# Altium PCB PCB1.PcbDoc
Units mil, origin at the board's own origin, x right, y up, seen from the top; angles counter-clockwise.
Board outline 20165 x 9400 mil, 2 copper layers (Top Layer, Bottom Layer); 43 components, 126 nets, 206 pads, 0 vias.
Unrouted connection lines stored in the file: 1.
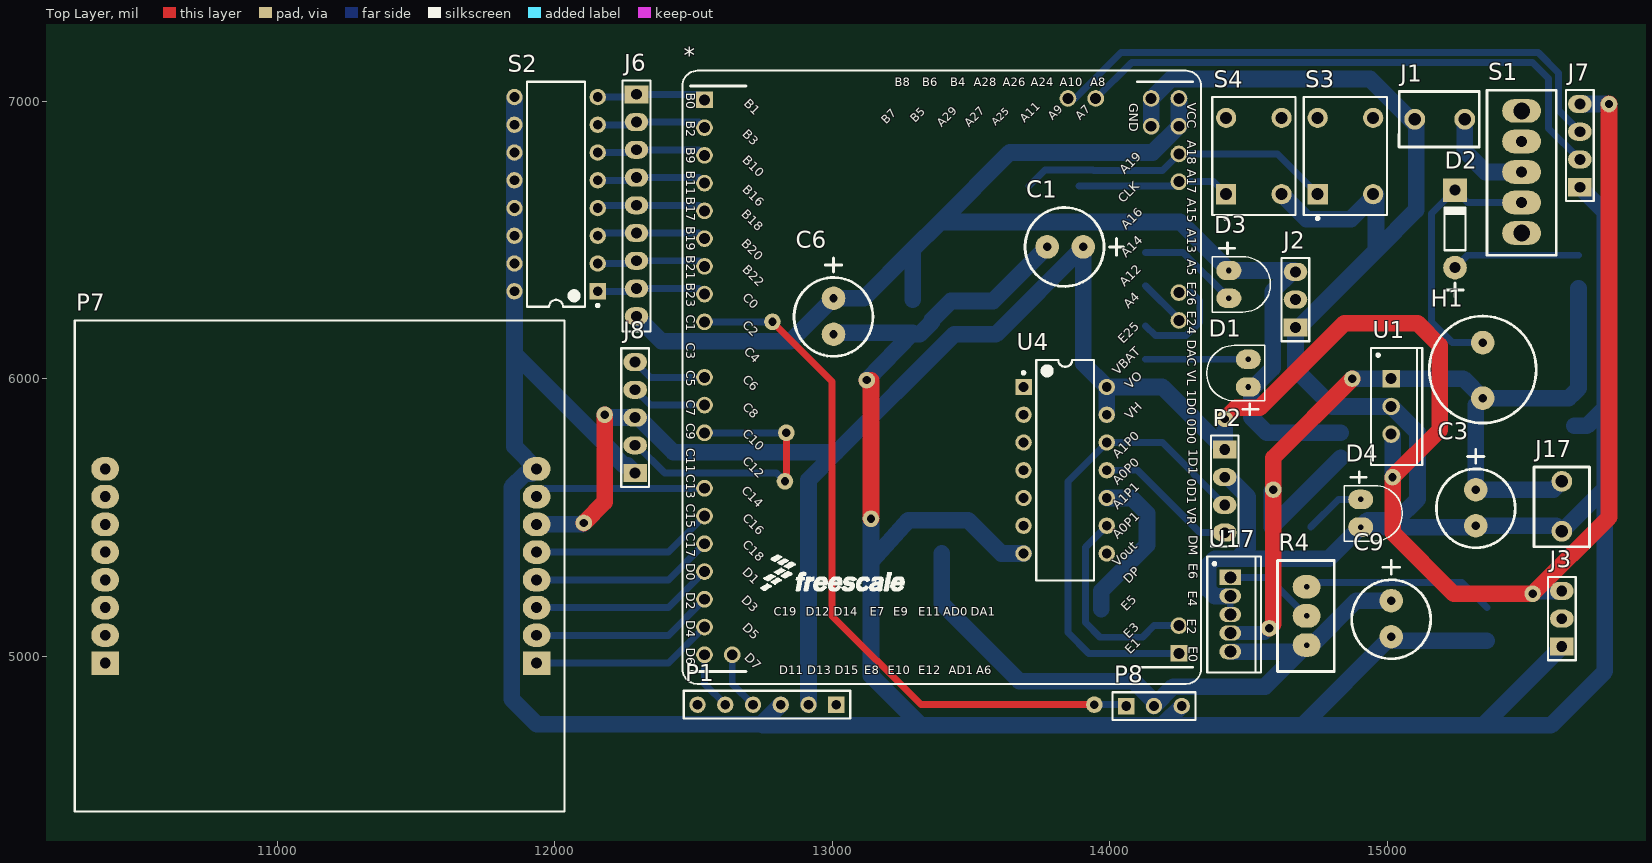
[diagram p0: Top Layer view]
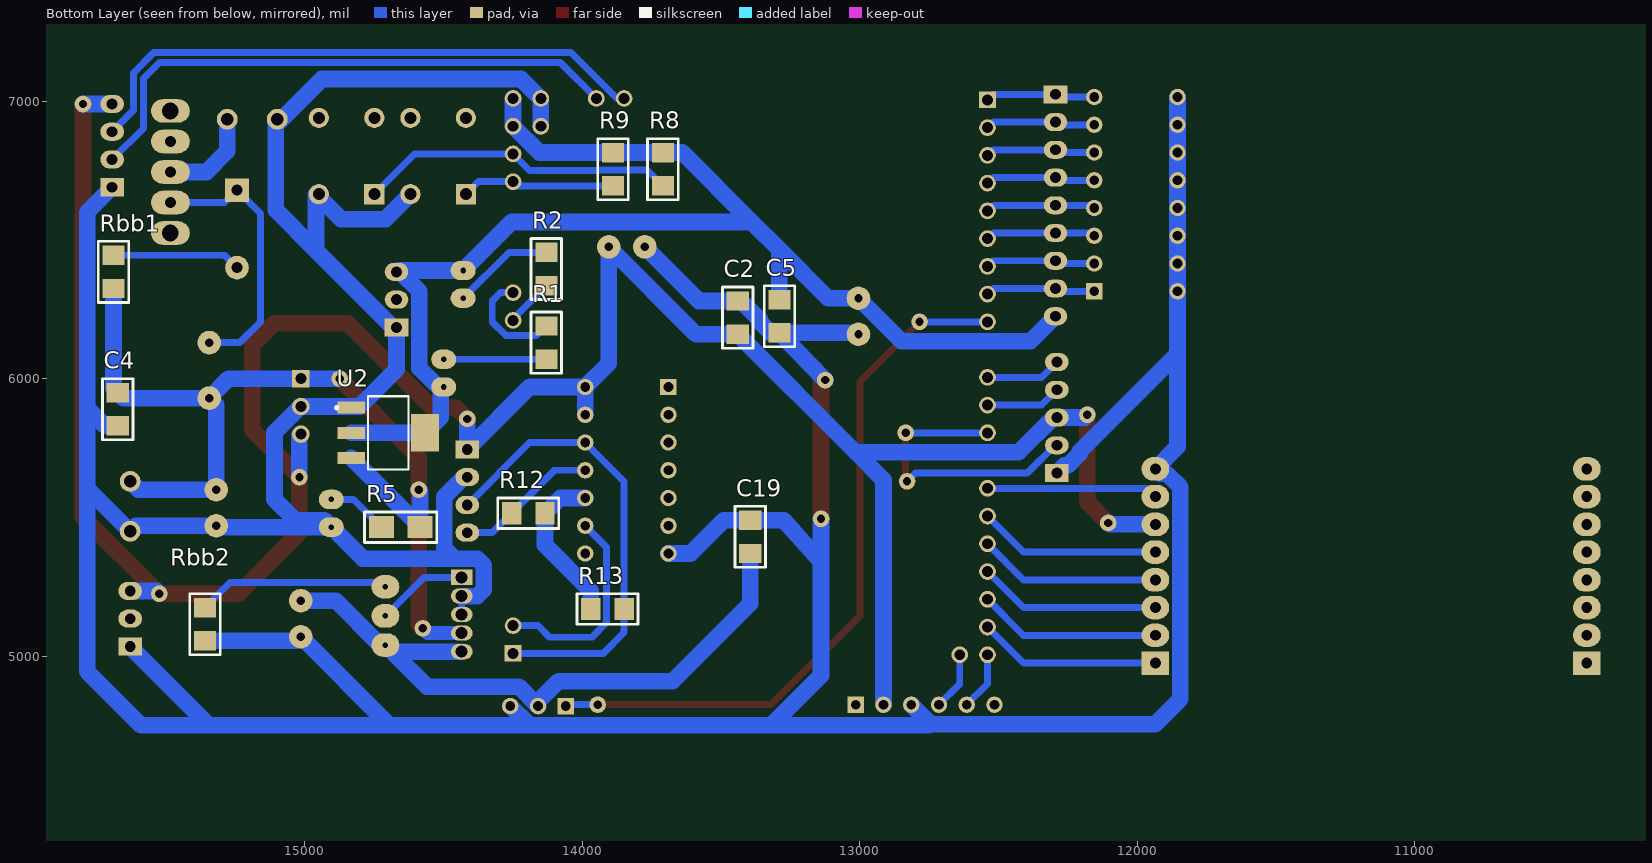
[diagram p1: Bottom Layer view, seen from below]

## Layer stack, top to bottom
Top Layer: signal copper 1.4
Dielectric: dielectric 12.6, FR-4, Dk 4.8
Bottom Layer: signal copper 1.4

## Board outline
9450,10320 29615,10320 29615,920 9450,920 9450,10320

## Design rules (kind name [scope] priority, off if disabled: settings)
Clearance [All] p1: gap=10
PolygonConnect [All] p1: connectstyle=Relief reliefconductorwidth=10 reliefentries=4 polygonreliefangle="90 Angle" airgapwidth=10
RoutingVias [All] p1: holewidth=28 width=50 viastyle="Through Hole" minholewidth=28 minwidth=50 maxholewidth=28 maxwidth=50
SolderMaskExpansion [All] p1: expansion=4
Width [All] p1: maxlimit=100 minlimit=10 preferedwidth=30
28 further rules are at their usual default settings.

## Components (designator, comment, footprint, x,y, rotation, side; value= is the part's Value field where it differs from the comment)
* "Component_2" K60 13950,6910 r0 top
C1 "CAP+DIP" CAP+DIP 13840,6475 r180 top
C2 "CAP" CAP 13440,6225 r270 bottom
C3 "CAP+DIP" CAP+DIP 15320,5535 r270 top
C4 "CAP" CAP 15675,5885 r90 bottom
C5 "CAP" CAP 13290,6220 r90 bottom
C6 "CAP+DIP" CAP+DIP 13005,6225 r270 top
C9 "CAP+DIP" CAP+DIP 15015,5135 r270 top
C19 "CAP" CAP 13395,5435 r270 bottom
D1 "LED" LED 14490,6020 r90 top
D2 "Diode" DIODE-DIP 15245,6535 r90 top
D3 "LED" LED 14440,6340 r270 top
D4 "LED" LED 14915,5515 r270 top
H1 "Inductor_G" INDUCTOR-G 15345,6130 r270 top
J1 "JJ" "PCBComponent_1 - duplicate" 15280,6935 r180 top
J2 "Header1x3" HEADER1X3 14670,6285 r90 top
J3 "Header1x3" HEADER1X3 15630,5135 r90 top
J6 "Header1x9" HEADER1X9 12295,6625 r270 top
J7 "Header1x4" HEADER1X4 15695,6840 r90 top
J8 "Header1x5" HEADER1X5 12300,5855 r90 top
J17 "JJ" "PCBComponent_1 - duplicate" 15630,5630 r270 top
P1 "Bluetooth" HDR1X6 13015,4825 r180 top
P2 "编码器1接口" header1x4 14415,5595 r270 top
P7 "LCD-Nokia" LCD-NOKIA 11100,5335 r90 top
P8 "Header 3" HDR1X3 14060,4820 r0 top
R1 "1K" "res a" 14130,6070 r0 bottom
R2 "1K" "res a" 14130,6455 r180 bottom
R4 "RES-Change" RES-Change 14705,5150 r90 top
R5 "RES" res 14655,5465 r0 bottom
R8 "Res2" "res a" 13710,6815 r180 bottom
R9 "Res2" "res a" 13890,6815 r180 bottom
R12 "RES" "RES a" 14255,5515 r90 bottom
R13 "RES" "RES a" 13850,5170 r270 bottom
Rbb1 "Res2" "res a" 15690,6325 r0 bottom
Rbb2 "Res2" "res a" 15360,5055 r0 bottom
S1 "SW-2" SW-2 15490,6745 r270 top
S2 "SW-DIP8" DIP-16 12005,6665 r180 top
S3 "SW-Button-B" DPST-4 14750,6665 r90 top
S4 "SW-Button-B" DPST-4 14420,6665 r90 top
U1 "LM2940T-5.0" T03B 15015,5900 r270 top
U2 "REG1117" REG1117 14720,5800 r180 bottom
U4 "74LS74" DIP-14 13840,5670 r0 top
U17 "LM2941CT" T05A 14435,5150 r270 top

## Footprints (in the part's own frame and the unit in brackets; to place one, negate y for a bottom-side part, rotate by r counter-clockwise, add the part's x,y. Pads: shape width x height; smd on the part's side, far side on the other; paste and mask are expansions set on the pad)
CAP [mil]
  rect 70x80 smd: 1(-55,0) 2(65,0)
  silkscreen extent -105,-55 115,55
CAP+DIP [mil]
  round 85 hole 30: 1(-65,0) 2(65,0)
  silkscreen extent -210,-142 144,142
DIODE-DIP [mil]
  round 85 hole 39: 1(-134.76,0)
  rect 85x85 hole 39: 2(144.76,0)
  silkscreen extent -240,-37 86,37
DIP-14 [mm] "DIP; 14 Leads; Row Spacing 7.62 mm; Pitch 2.54 mm"
  rect 1.5x1.5 hole 0.9: 1(-3.81,7.62)
  round 1.5 hole 0.9: 2(-3.81,5.08) 3(-3.81,2.54) 4(-3.81,0) 5(-3.81,-2.54) 6(-3.81,-5.08) 7(-3.81,-7.62) 8(3.81,-7.62) 9(3.81,-5.08) 10(3.81,-2.54) 11(3.81,0) 12(3.81,2.54) 13(3.81,5.08) 14(3.81,7.62)
  silkscreen extent -3.93,-10.1 2.65,10.1, body extent -3.6,-10.1 3.6,10.1, height 5.08
DIP-16 [mm] "DIP; 16 Leads; Row Spacing 7.62 mm; Pitch 2.54 mm"
  rect 1.5x1.5 hole 0.9: 1(-3.81,8.89)
  round 1.5 hole 0.9: 2(-3.81,6.35) 3(-3.81,3.81) 4(-3.81,1.27) 5(-3.81,-1.27) 6(-3.81,-3.81) 7(-3.81,-6.35) 8(-3.81,-8.89) 9(3.81,-8.89) 10(3.81,-6.35) 11(3.81,-3.81) 12(3.81,-1.27) 13(3.81,1.27) 14(3.81,3.81) 15(3.81,6.35) 16(3.81,8.89)
  silkscreen extent -3.94,-10.3 2.65,10.31, body extent -3.6,-10.28 3.6,10.28, height 5.08
DPST-4 [mm] "Switch; 4 Leads"
  rect 1.85x1.85 hole 1.1: 1(0,0)
  round 1.85 hole 1.1: 2(0,-5.08) 3(6.985,-5.08) 4(6.985,0)
  silkscreen extent -2.34,-6.35 8.89,1.27
HDR1X3 [mm] "Connector; Header; 3 Position"
  rect 1.5x1.5 hole 0.9: 1(0,0)
  round 1.5 hole 0.9: 2(2.54,0) 3(5.08,0)
  silkscreen extent -1.27,-1.27 6.35,1.27
HDR1X6 [mm] "Connector; Header; 6 Position"
  rect 1.5x1.5 hole 0.9: 1(0,0)
  round 1.5 hole 0.9: 2(2.54,0) 3(5.08,0) 4(7.62,0) 5(10.16,0) 6(12.7,0)
  silkscreen extent -1.27,-1.27 13.97,1.27
HEADER1X3 [mil]
  rect 65x85 hole 39: 1(-100,0)
  oval 65x85 hole 39: 2(0,0) 3(100,0)
  silkscreen extent -150,-50 150,50
HEADER1X4 [mil]
  rect 65x85 hole 39: 1(-150,0)
  oval 65x85 hole 39: 2(-50,0) 3(50,0) 4(150,0)
  silkscreen extent -200,-50 200,50
header1x4 [mil]
  rect 65x85 hole 39: 1(-150,0)
  oval 65x85 hole 39: 2(-50,0) 3(50,0) 4(150,0)
  silkscreen extent -200,-50 200,50
HEADER1X5 [mil]
  rect 65x85 hole 39: 1(-195,10)
  oval 65x85 hole 39: 2(-95,10) 3(5,10) 4(105,10) 5(205,10)
  silkscreen extent -245,-40 255,60
HEADER1X9 [mil]
  rect 65x85 hole 39: 1(-400,0)
  oval 65x85 hole 39: 2(-300,0) 3(-200,0) 4(-100,0) 5(0,0) 6(100,0) 7(200,0) 8(300,0) 9(400,0)
  silkscreen extent -450,-50 455,50
INDUCTOR-G [mil]
  round 85 hole 30: 1(0,0) 2(200,0)
  silkscreen extent -95,-193 290,193
K60 [mil]
  rect 60x60 hole 39.37: 1(-1410,95) 59(300,-1900)
  round 60 hole 39.37: 3(-1410,-5) 5(-1410,-105) 7(-1410,-205) 9(-1410,-305) 11(-1410,-405) 13(-1410,-505) 15(-1410,-605) 17(-1410,-705) 21(-1410,-905) 23(-1410,-1005) 25(-1410,-1105) 29(-1410,-1305) 31(-1410,-1405) 33(-1410,-1505) 35(-1410,-1605) 37(-1410,-1705) 39(-1410,-1805) 41(-1410,-1905) 42(-1310,-1905) 61(300,-1800) 83(300,-700) 85(300,-600) 93(300,-200) 95(300,-100) 97(300,0) 98(200,0) 99(300,100) 100(200,100) 102(0,100) 104(-100,100)
  silkscreen extent -1490,-2010 380,200
LCD-NOKIA [mil]
  rect 85x100 hole 39: 1(-360,-835) ""(-360,720)
  oval 85x100 hole 39: 2(-260,-835) 3(-160,-835) 4(-60,-835) 5(40,-835) 6(140,-835) 7(240,-835) 8(340,-835) ""(-260,720) ""(-160,720) ""(-60,720) ""(40,720) ""(140,720) ""(240,720) ""(340,720)
  silkscreen extent -895,-935 875,830
LED [mil]
  oval 70x90 hole 20: 1(-50,-10) 2(50,-10)
  silkscreen extent -150,-70 100,140
"PCBComponent_1 - duplicate" [mm]
  round 1.905 hole 1.16: 1(0,0) 2(4.572,0)
  silkscreen extent -1.32,-2.54 6.02,2.54
REG1117 [mm]
  rect 2.54x1.1 smd: 1(-2.867,2.427) 2(-2.867,0.127) 3(-2.867,-2.173)
  rect 2.54x3.45 smd: 4(3.883,0.127)
  silkscreen extent -4.32,-3.22 2.36,3.48
res [mil]
  rect 90x80 smd: 1(-70,0) 2(70,0)
  silkscreen extent -130,-55 130,55
"res a" [mil]
  rect 80x70 smd: 1(0,0) 2(0,-120)
  silkscreen extent -55,-170 55,50
"RES a" [mil]
  rect 80x70 smd: 1(0,0) 2(0,-120)
  silkscreen extent -55,-170 55,50
RES-Change [mil]
  oval 85x100 hole 20: 1(-110,-5) 2(100,-5) 3(-5,-5)
  silkscreen extent -205,-105 195,100
SW-2 [mil]
  oval 85x140 hole 39: 1(-110,-5) 2(0,-5) 3(110,-5)
  oval 85x140 hole 60: ""(-220,-5) ""(220,-5)
  silkscreen extent -295,-130 300,120
T03B [mm] "TO, Thru-Hole, Vertical, Heatsink Mounted; 3 In-Line Leads; Pitch 2.54 mm"
  rect 1.6x1.6 hole 1: 1(-2.54,0)
  round 1.6 hole 1: 2(0,0) 3(2.54,0)
  silkscreen extent -5.35,-1.85 5.35,2.85, body extent -5.4,-1.9 5.4,2.9, height 19.4
T05A [mm] "TO, Thru-Hole, Vertical, Heatsink Mounted; 5 In-Line Leads; Pitch 1.70 mm"
  rect 1.4x2 hole 1.1: 1(-3.4,0)
  oval 1.4x2 hole 1.1: 2(-1.7,0) 3(0,0) 4(1.7,0) 5(3.4,0)
  silkscreen extent -5.3,-2.1 5.3,2.8, body extent -5.35,-2.15 5.35,2.85, height 19.6

## Part data
P2: library part "Header 4", "Header, 4-Pin"
P8: "Header, 3-Pin"
R1 R2: library part Res1
R8 R9 Rbb1 Rbb2: "Resistor"
U1: "1A Low Dropout Regulator, 3-pin TO-220"
U17: "1A Low Dropout Adjustable Regulator, 5-pin TO-220"

## Free pads (board coordinates)
  round 60 hole 30: 0(14415,5855) 0(14575,5100) 1(13125,5995) 1(13945,4825) 2(12785,6205) 3(13140,5495) 4(12180,5870) 5(12105,5480) 6(12830,5630) 7(12835,5805) 8(14590,5600) 9(14875,6000) 13(15800,6990) 14(15525,5225) 15(15020,5645)

## Nets (pads, with @x,y where several pads share a name; then routed paths per layer and width w, separated by ;. In a path a pad name is that pad's centre, name@x,y a point inside that pad or via, vN(x,y) a via of type N, cw(c..) or ccw(c..) an arc to the next point about the centre after c; other vN are vias at no path point)
0D0: 
0D1: 
1D0: 
1D1: 
3.3V: *.97 *.99 C5.2 C6.1 D1.1 D3.1 J2.3 J6.9 R8.1 R9.1 U2.2 U2.4 | length 4890.9
  Bottom Layer w60: J6.9 12385,6135 12850,6135 C6.1 13115,6290 13290,6465 ; C5.2 13290,6465 ; *.99 *.97 14155,6815 R9.1 R8.1 13640,6815 13390,6565 ; U2.2 U2.4 14510,5862.13 14510,5960 14587.5,6037.5 14587.5,6315.03 14657.47,6385 J2.3 14665,6390 D3.1 14255,6565 13390,6565 ; 13290,6465 13390,6565
5V: C1.1 C2.2 J3.3 J7.4 J8.3 P1.2 P2.1 P7.6 pad.0@14415,5855 pad.4 pad.5 pad.13 pad.14 pad.15 R12.2 R13.2 U1.3 U4.10 U4.13 U4.14 | length 10024.2
  Top Layer w60: pad.5 12180,5555 pad.4 ; pad.0@14415,5855 14455,5895 14541.07,5895 14846.07,6200 15110,6200 15190,6120 15190,5815 pad.15 15020,5445 15240,5225 pad.14 15800,5500 pad.13
  Bottom Layer w60: P7.6 12100,5475 pad.5 ; pad.4 12190,5860 J8.3 12302.53,5860 12427.53,5735 13015,5735 ; P1.2 12915,5635 13015,5735 ; R13.2 13970,5235 14135,5400 R12.2 14080,5570 U4.10 ; U4.13 U4.14 ; pad.0@14415,5855 P2.1 14190,5970 U4.14 ; U1.3 15020,5795 pad.15 ; pad.14 15535,5235 J3.3 ; J7.4 pad.13 ; 13015,5735 C2.2 13590,6160 C1.1 13905,6055 U4.14
6V: C9.1 C19.2 P8.2 R4.1 U17.5 | length 2370
  Bottom Layer w60: C19.2 13395,5189.53 13674.53,4910 14085.62,4910 14159.8,4835.82 14159.8,4820.47 14229.33,4890 14560,4890 R4.1@14685.51,5015.51 ; U17.5@14435,5015.51 R4.1@14685.51,5015.51 ; C9.1 14889.17,5200 14729.17,5040 R4.1 R4.1@14685.51,5015.51
7.2V: C3.1 C4.2 H1.2 J17.1 pad.0@14575,5100 pad.8 pad.9 R5.1 Rbb1.1 U1.1 U2.3 U17.4 | length 3540.2
  Top Layer w60: pad.0@14575,5100 14590,5115 pad.8 14590,5715 pad.9
  Bottom Layer w50: U17.4 14558.07,5083.07 pad.0@14575,5100
  Bottom Layer w60: R5.1 R5.1@14585,5466.57 ; pad.8 14585,5595 R5.1@14585,5466.57 ; U2.3 R5.1@14585,5466.57 ; pad.9 U1.1 15275,6000 H1.2 ; J17.1 15600,5600 C3.1 15320,5905 H1.2 ; Rbb1.1 15690,5965 C4.2 15655,5930 H1.2
A0P0: 
A0P1: 
A1P0: 
A1P1: 
AD0: 
AD1: 
CLK: 
DA1: 
DAC: 
DGND: *.98 *.100 C1.2 C2.1 C3.2 C4.1 C5.1 C6.2 C9.2 C19.1 D4.2 J1.2 J2.1 J3.1 J7.1 J8.1 J17.2 P1.3 P2.2 P7.8 P8.3 pad.1@13125,5995 pad.3 Rbb2.1 S2.9 S2.10 S2.11 S2.12 S2.13 S2.14 S2.15 S2.16 S3.2 S4.2 U1.2 U2.1 U4.7 U17.2 U17.3 | length 19480.1
  Top Layer w60: pad.1@13125,5995 13140,5995 pad.3
  Bottom Layer w25: U17.3 U17.2@14435,5216.3
  Bottom Layer w60: S2.9 S2.10 S2.11 S2.12 S2.13 S2.14 S2.15 S2.16 11855,6090 ; J8.1 12262.5,5687.5 12249.97,5687.5 12207.5,5729.97 12207.5,5737.5 11855,6090 ; P1.3 12745,4755 ; C6.2 13010,6165 C5.1 pad.1@13125,5995 ; pad.3 13140,5340.5 ; C5.1@13290,6160 13315,6160 13360,6205 13360,6211.57 13428.43,6280 C2.1 13580,6280 C1.2 ; U4.7 13610,5370 13490,5490 C19.1 13275,5490 13144.5,5345 13140,5340.5 ; *.98 *.100 14151.01,7010 14221.01,7080 14938.94,7080 15105,6913.94 15105,6607.47 14960,6462.47 ; P8.3 14195,4755 14193.33,4755 14188.8,4750.47 ; P2.2 14427.53,5645 14497.5,5575.03 14497.5,5388.73 14460.18,5351.42 ; U17.2@14435,5216.3 14379.06,5216.3 14355.63,5239.73 14355.63,5327.99 14379.06,5351.42 14460.18,5351.42 ; S4.2 14710,6575 14870,6575 14960,6665 14960,6462.47 ; Rbb2.1 15030,5055 C9.2 14695.47,4750.47 ; J3.1 15345.47,4750.47 ; C4.1 15720,5830 15785,5895 ; J7.1 15785,6600 15785,5895 ; 15785,5538.43 15785,5605 ; 11855,6090 11855,5755 P7.8 11917.5,5657.5 11893.33,5657.5 11845,5609.17 11845,4845 11935,4755 12745,4755 ; 12745,4755 12749.53,4750.47 13320,4750.47 ; 13140,5340.5 13140,4930.47 13320,4750.47 ; 13320,4750.47 14188.8,4750.47 ; 14188.8,4750.47 14695.47,4750.47 ; 14460.18,5351.42 14791.42,5351.42 D4.2 ; 14695.47,4750.47 15345.47,4750.47 ; D4.2 14930,5490 15035,5490 15110,5565 15110,5806.11 15016.11,5900 U1.2 14803.42,5900 14670,6033.43 J2.1 14682.53,6185 14960,6462.47 ; D4.2 15315,5465 C3.2 15610,5470 J17.2 15785,5605 ; 15345.47,4750.47 15590.47,4750.47 15785,4945 15785,5605 ; 15785,5605 15785,5895
DM: 
DP: 
NetD1_2: D1.2 R1.1 | length 370
  Bottom Layer w25: R1.1 D1.2
NetD2_1: D2.1 Rbb1.2 | length 463.5
  Bottom Layer w25: D2.1 15289.76,6445 Rbb1.2
NetD2_2: D2.2 H1.1 S1.3 | length 984.6
  Bottom Layer w25: H1.1 15235,6130 15160,6205 15160,6594.76 D2.2 15289.76,6635 S1.3
NetD3_2: D3.2 R2.1 | length 368.3
  Bottom Layer w25: R2.1 14265,6455 D3.2
NetD4_1: D4.1 R5.2 | length 221.4
  Bottom Layer w25: R5.2 14825,5565 D4.1
NetJ1_1: J1.1 S1.2 | length 351.1
  Bottom Layer w60: J1.1 15280,6820 15355,6745 S1.2
NetP2_4: P2.4 R12.1 U4.11 | length 518.2
  Bottom Layer w25: U4.11 14100,5670 R12.1 14325,5445 P2.4
NetR4_2: R4.2 Rbb2.2 | length 693.5
  Bottom Layer w25: R4.2 14725,5265 15270,5265 Rbb2.2
NetR4_3: R4.3 U17.1 | length 332.5
  Bottom Layer w25: U17.1 14571.14,5283.86 R4.3
PTA4: 
PTA5: 
PTA6: 
PTA7: 
PTA8: *.102 J7.2 | length 2049.3
  Bottom Layer w25: *.102 14080,7140 15525,7140 15582.5,7082.5 15582.5,6902.5 J7.2
PTA9: 
PTA10: *.104 J7.3 | length 2110.5
  Bottom Layer w25: *.104 13875.75,7010 14040.75,7175 15545,7175 15617.5,7102.5 15617.5,6967.5 J7.3
PTA11: 
PTA12: 
PTA13: 
PTA14: 
PTA15: 
PTA16: 
PTA17: *.93 R9.2 S4.1 | length 554.9
  Bottom Layer w25: R9.2 14235,6695 *.93 14375,6710 S4.1
PTA18: *.95 R8.2 S3.1 | length 1149.8
  Bottom Layer w25: R8.2 13767.5,6752.5 13939.32,6752.5 13941.82,6750 14190,6750 *.95 14605,6810 S3.1
PTA19: 
PTA24: 
PTA25: 
PTA26: 
PTA27: 
PTA28: 
PTA29: 
PTB0: *.1 J6.1 S2.8 | length 397.4
  Bottom Layer w25: S2.8 12285,7015 J6.1 12520,7025 *.1
PTB1: 
PTB2: *.3 J6.2 S2.7 | length 397.4
  Bottom Layer w25: S2.7 12285,6915 J6.2 12520,6925 *.3
PTB3: 
PTB4: 
PTB5: 
PTB6: 
PTB7: 
PTB8: 
PTB9: *.5 J6.3 S2.6 | length 397.4
  Bottom Layer w25: S2.6 12285,6815 J6.3 12520,6825 *.5
PTB10: 
PTB11: *.7 J6.4 S2.5 | length 397.4
  Bottom Layer w25: S2.5 12285,6715 J6.4 12520,6725 *.7
PTB12: 
PTB17: *.9 J6.5 S2.4 | length 397.4
  Bottom Layer w25: S2.4 12165,6625 J6.5 12520,6625 *.9
PTB18: 
PTB19: *.11 J6.6 S2.3 | length 397.4
  Bottom Layer w25: S2.3 12165,6525 J6.6 12520,6525 *.11
PTB20: 
PTB21: *.13 J6.7 S2.2 | length 397.4
  Bottom Layer w25: S2.2 12285,6415 J6.7 12520,6425 *.13
PTB22: 
PTB23: *.15 J6.8 S2.1 | length 397.4
  Bottom Layer w25: S2.1 12285,6315 J6.8 12520,6325 *.15
PTC0: 
PTC1: *.17 P8.1 pad.1@13945,4825 pad.2 | length 2588.7
  Top Layer w25: pad.2 13000,5990 13000,5145 13320,4825 pad.1@13945,4825
  Bottom Layer w25: *.17 pad.2 ; pad.1@13945,4825 14055,4825 P8.1
PTC2: 
PTC3: 
PTC4: 
PTC5: *.21 J8.5 | length 272.8
  Bottom Layer w25: J8.5 12345,6005 *.21
PTC6: 
PTC7: *.23 J8.4 | length 272.8
  Bottom Layer w25: J8.4 12345,5905 *.23
PTC8: 
PTC9: *.25 J8.2 pad.6 pad.7 | length 1065.9
  Top Layer w25: pad.6 12835,5635 pad.7
  Bottom Layer w25: J8.2 12296.82,5760 12396.82,5660 12800,5660 pad.6 ; *.25 pad.7
PTC10: 
PTC11: 
PTC12: 
PTC13: *.29 P7.7 | length 617.4
  Bottom Layer w25: P7.7 11965,5605 *.29
PTC14: 
PTC15: *.31 P7.5 | length 658.8
  Bottom Layer w25: P7.5 12410,5375 *.31
PTC16: 
PTC17: *.33 P7.4 | length 658.8
  Bottom Layer w25: P7.4 12410,5275 *.33
PTC18: 
PTC19: 
PTD0: *.35 P7.3 | length 658.8
  Bottom Layer w25: P7.3 12410,5175 *.35
PTD1: 
PTD2: *.37 P7.2 | length 658.8
  Bottom Layer w25: P7.2 12410,5075 *.37
PTD3: 
PTD4: *.39 P7.1 | length 658.8
  Bottom Layer w25: P7.1 12410,4975 *.39
PTD5: 
PTD6: *.41 P1.5 | length 211.1
  Bottom Layer w25: *.41 12540,4900 P1.5
PTD7: *.42 P1.4 | length 211.1
  Bottom Layer w25: *.42 12640,4900 P1.4
PTD11: 
PTD12: 
PTD13: 
PTD14: 
PTD15: 
PTE0: *.59 P2.3 R13.1 U4.12 | length 1692.3
  Bottom Layer w25: *.59 13925,5010 13850,5085 R13.1 13850,5630 U4.12 14190,5770 P2.3
PTE1: 
PTE2: *.61 U4.9 | length 758
  Bottom Layer w25: U4.9 13912.5,5392.5 13912.5,5120.68 13965,5068.18 14118.18,5068.18 14160,5110 *.61
PTE3: 
PTE4: 
PTE5: 
PTE6: 
PTE7: 
PTE8: 
PTE9: 
PTE10: 
PTE11: 
PTE12: 
PTE24: *.83 R2.2 | length 174.7
  Bottom Layer w25: R2.2 14250,6215 *.83
PTE25: 
PTE26: *.85 R1.2 | length 392.6
  Bottom Layer w25: R1.2 14165,6155 14275,6155 14325,6205 14325,6280 14295,6310 *.85
V0: 
VBAT: 
VH: 
VL: 
VOUT: 
VR: 
pads on no net: J2.2 J3.2 P1.1 P1.6 P7. S1. S1.1 S3.3 S3.4 S4.3 S4.4 U4.1 U4.2 U4.3 U4.4 U4.5 U4.6 U4.8

## Text inside footprints (layer, text, board x,y; h text height)
*: Top Overlay "D2" at 12475.12,5229.88 h33 r270; Top Overlay "C19" at 12790.12,5144.88 h30; Top Overlay "D12" at 12905.12,5144.88 h30; Top Overlay "D14" at 13005.12,5144.88 h30; Top Overlay "E7" at 13135.12,5144.88 h30; Top Overlay "E9" at 13220.12,5144.88 h30; Top Overlay "E11" at 13310.12,5144.88 h30; Top Overlay "AD0" at 13400.12,5144.88 h30; Top Overlay "DA1" at 13500.12,5144.88 h30; Top Overlay "A6" at 13520.12,4934.88 h30; Top Overlay "AD1" at 13420.12,4934.88 h30; Top Overlay "E12" at 13310.12,4934.88 h30; Top Overlay "E10" at 13200.12,4934.88 h30; Top Overlay "E8" at 13115.12,4934.88 h30; Top Overlay "D15" at 13010.12,4934.88 h30; Top Overlay "D13" at 12910.12,4934.88 h30; Top Overlay "D11" at 12810.12,4934.88 h30; Top Overlay "B7" at 13195.12,6914.88 h30 r45; Top Overlay "B5" at 13300.12,6919.88 h30 r45; Top Overlay "A29" at 13395.12,6904.88 h30 r45; Top Overlay "A27" at 13495.12,6904.88 h30 r45; Top Overlay "A25" at 13590.12,6909.88 h28 r45; Top Overlay "A11" at 13695.12,6919.88 h30 r45; Top Overlay "A9" at 13795.12,6929.88 h30 r45; Top Overlay "A7" at 13895.12,6929.88 h30 r45; Top Overlay "A8" at 13930.12,7054.88 h30; Top Overlay "A10" at 13820.12,7054.88 h30; Top Overlay "A24" at 13715.12,7054.88 h30; Top Overlay "A26" at 13615.12,7054.88 h30; Top Overlay "A28" at 13510.12,7054.88 h30; Top Overlay "B4" at 13425.12,7054.88 h30; Top Overlay "B6" at 13325.12,7054.88 h30; Top Overlay "B8" at 13225.12,7054.88 h30; Top Overlay "GND" at 14070.49,6993.54 h33 r270; Top Overlay "VCC" at 14280,6995 h33 r270; Top Overlay "A18" at 14280,6860 h33 r270; Top Overlay "A19" at 14055,6735 h33 r45; Top Overlay "E0" at 14285,5035 h33 r270; Top Overlay "E1" at 14075,5005 h33 r45; Top Overlay "E2" at 14280,5135 h33 r270; Top Overlay "A17" at 14280,6755 h33 r270; Top Overlay "CLK" at 14050,6630 h33 r45; Top Overlay "A15" at 14280,6650 h33 r270; Top Overlay "A16" at 14060,6535 h33 r45; Top Overlay "A13" at 14280,6540 h33 r270; Top Overlay "A14" at 14060,6435 h33 r45; Top Overlay "A5" at 14280,6430 h33 r270; Top Overlay "A12" at 14055,6330 h33 r45; Top Overlay "E26" at 14280,6350 h33 r270; Top Overlay "A4" at 14070,6250 h33 r45; Top Overlay "E25" at 14050,6125 h33 r45; Top Overlay "VBAT" at 14030,6010 h33 r45; Top Overlay "VO" at 14075,5960 h33 r45; Top Overlay "VH" at 14075,5850 h33 r45; Top Overlay "A1P0" at 14030,5710 h33 r45; Top Overlay "A0P0" at 14030,5615 h33 r45; Top Overlay "A1P1" at 14030,5525 h33 r45; Top Overlay "A0P1" at 14030,5420 h33 r45; Top Overlay "Vout" at 14030,5320 h33 r45; Top Overlay "DP" at 14070,5260 h33 r45; Top Overlay "E5" at 14060,5160 h33 r45; Top Overlay "E3" at 14070,5060 h33 r45; Top Overlay "E24" at 14280,6245 h33 r270; Top Overlay "DAC" at 14280,6140 h33 r270; Top Overlay "VL" at 14280,6030 h33 r270; Top Overlay "1D0" at 14280,5960 h33 r270; Top Overlay "0D0" at 14280,5855 h33 r270; Top Overlay "1D1" at 14285,5745 h33 r270; Top Overlay "0D1" at 14280,5640 h33 r270; Top Overlay "VR" at 14280,5535 h33 r270; Top Overlay "DM" at 14285,5435 h33 r270; Top Overlay "E6" at 14285,5335 h33 r270; Top Overlay "E4" at 14283.74,5235.86 h33 r270; Top Overlay "B1" at 12680,6990 h33 r315; Top Overlay "B3" at 12675,6880 h33 r315; Top Overlay "B10" at 12675,6785 h33 r315; Top Overlay "B16" at 12675,6680 h33 r315; Top Overlay "B18" at 12670,6590 h33 r315; Top Overlay "B20" at 12670,6485 h33 r315; Top Overlay "B22" at 12675,6390 h33 r315; Top Overlay "C0" at 12675,6290 h33 r315; Top Overlay "C2" at 12675,6190 h33 r315; Top Overlay "C4" at 12680,6095 h33 r315; Top Overlay "C6" at 12675,5995 h33 r315; Top Overlay "C8" at 12675,5895 h33 r315; Top Overlay "C10" at 12675,5800 h33 r315; Top Overlay "C12" at 12675,5700 h33 r315; Top Overlay "C14" at 12670,5595 h33 r315; Top Overlay "C16" at 12675,5495 h33 r315; Top Overlay "C18" at 12675,5400 h33 r315; Top Overlay "D1" at 12675,5300 h33 r315; Top Overlay "D3" at 12670,5200 h33 r315; Top Overlay "D5" at 12675,5100 h33 r315; Top Overlay "D7" at 12682.19,4991.88 h33 r315; Top Overlay "D6" at 12475,5030 h33 r270; Top Overlay "D4" at 12475,5130 h33 r270; Top Overlay "D0" at 12475,5335 h33 r270; Top Overlay "C17" at 12475,5445 h33 r270; Top Overlay "C15" at 12475,5550 h33 r270; Top Overlay "C13" at 12475,5655 h33 r270; Top Overlay "C11" at 12475,5750 h33 r270; Top Overlay "C9" at 12475,5840 h33 r270; Top Overlay "C7" at 12475,5925 h33 r270; Top Overlay "C5" at 12475,6030 h33 r270; Top Overlay "C3" at 12475,6130 h33 r270; Top Overlay "C1" at 12475,6230 h33 r270; Top Overlay "B23" at 12475,6345 h33 r270; Top Overlay "B21" at 12475,6445 h33 r270; Top Overlay "B19" at 12475,6550 h33 r270; Top Overlay "B17" at 12475,6655 h33 r270; Top Overlay "B11" at 12475,6750 h33 r270; Top Overlay "B9" at 12475,6835 h33 r270; Top Overlay "B2" at 12475,6930 h33 r270; Top Overlay "B0" at 12475,7030 h33 r270